# Altium PCB DS159-1.0-B呼吸率传感器.PcbDoc
Units mm, origin at the board's own origin, x right, y up, seen from the top; angles counter-clockwise.
Board outline 41 x 64 mm, 2 copper layers (Top Layer, Bottom Layer), stack 1.581 mm thick; 18 components, 30 nets, 90 pads, 34 vias.
Unrouted connection lines stored in the file: 7.
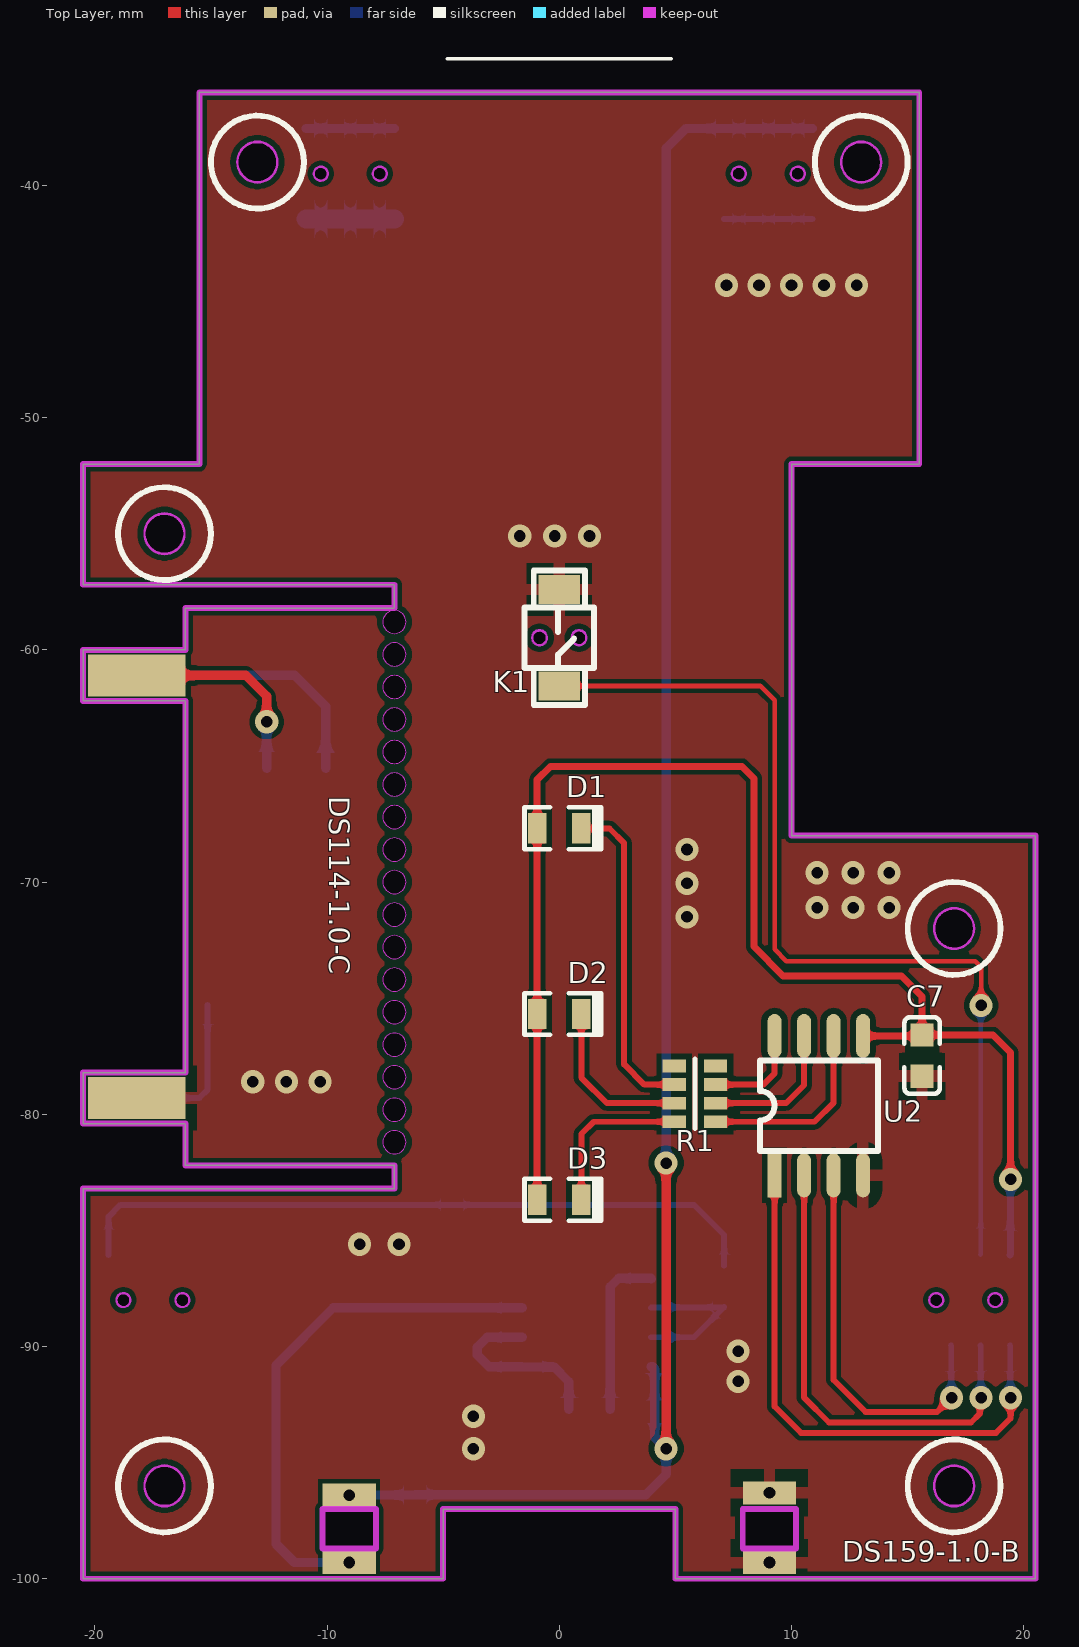
[diagram p0: Top Layer view]
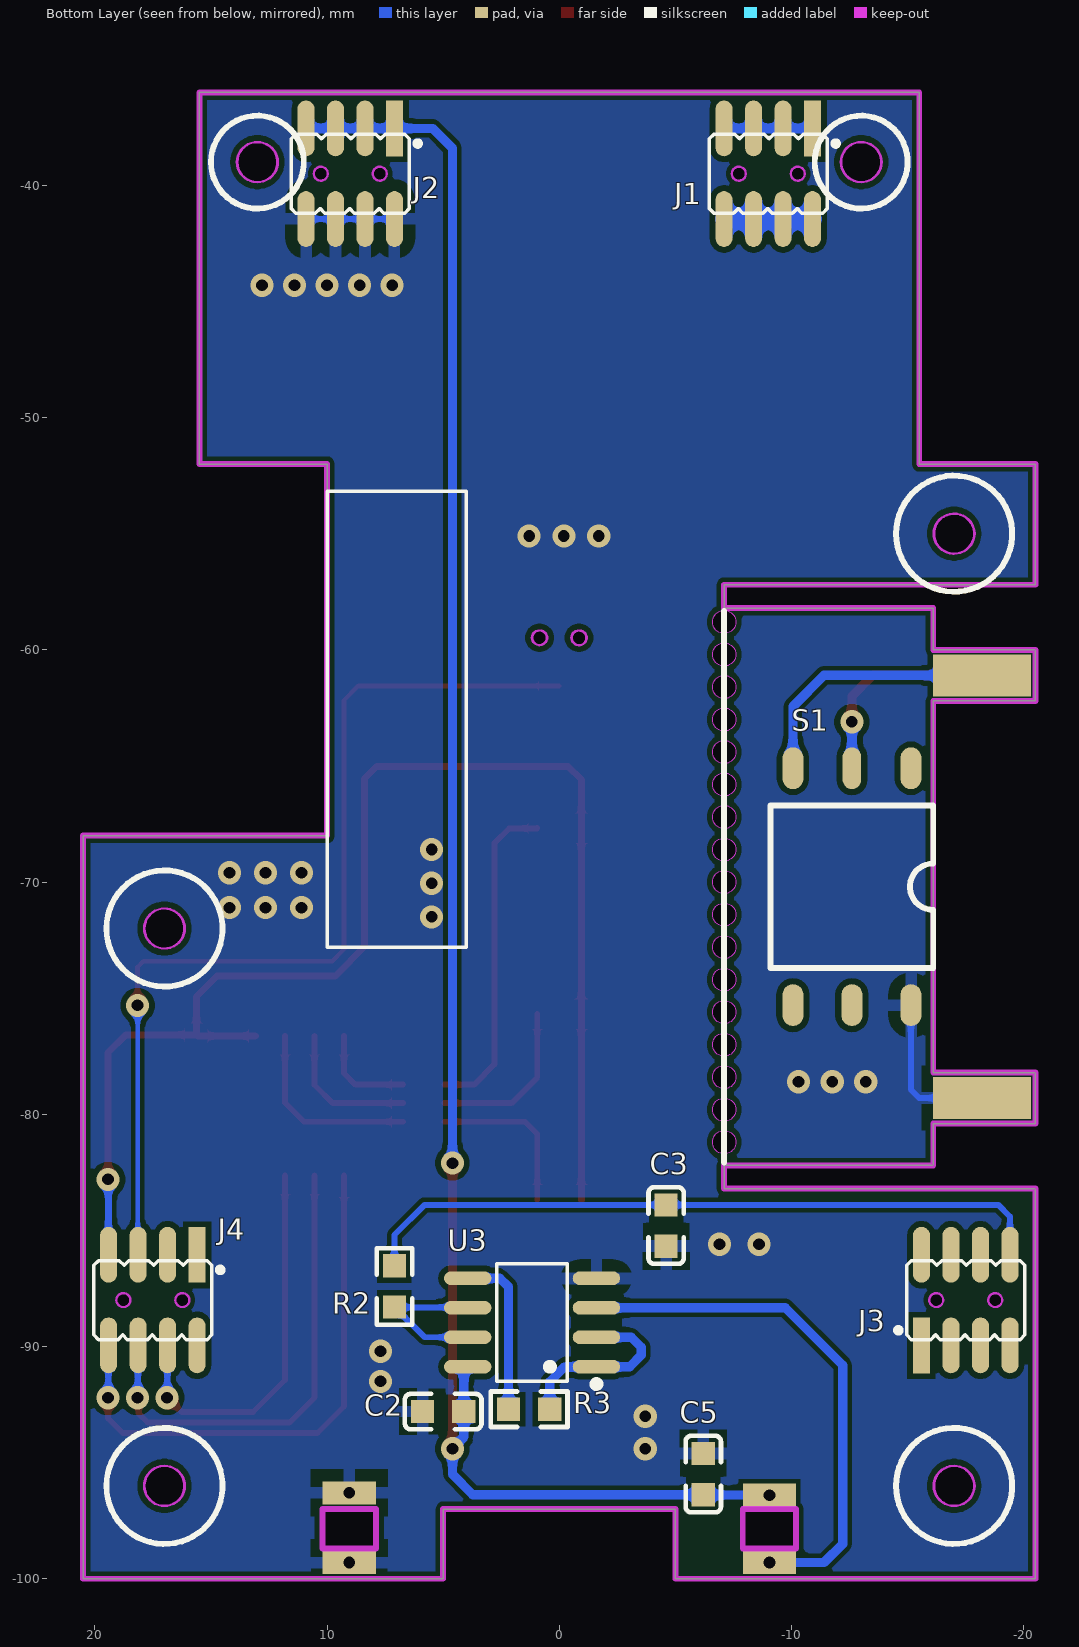
[diagram p1: Bottom Layer view, seen from below]
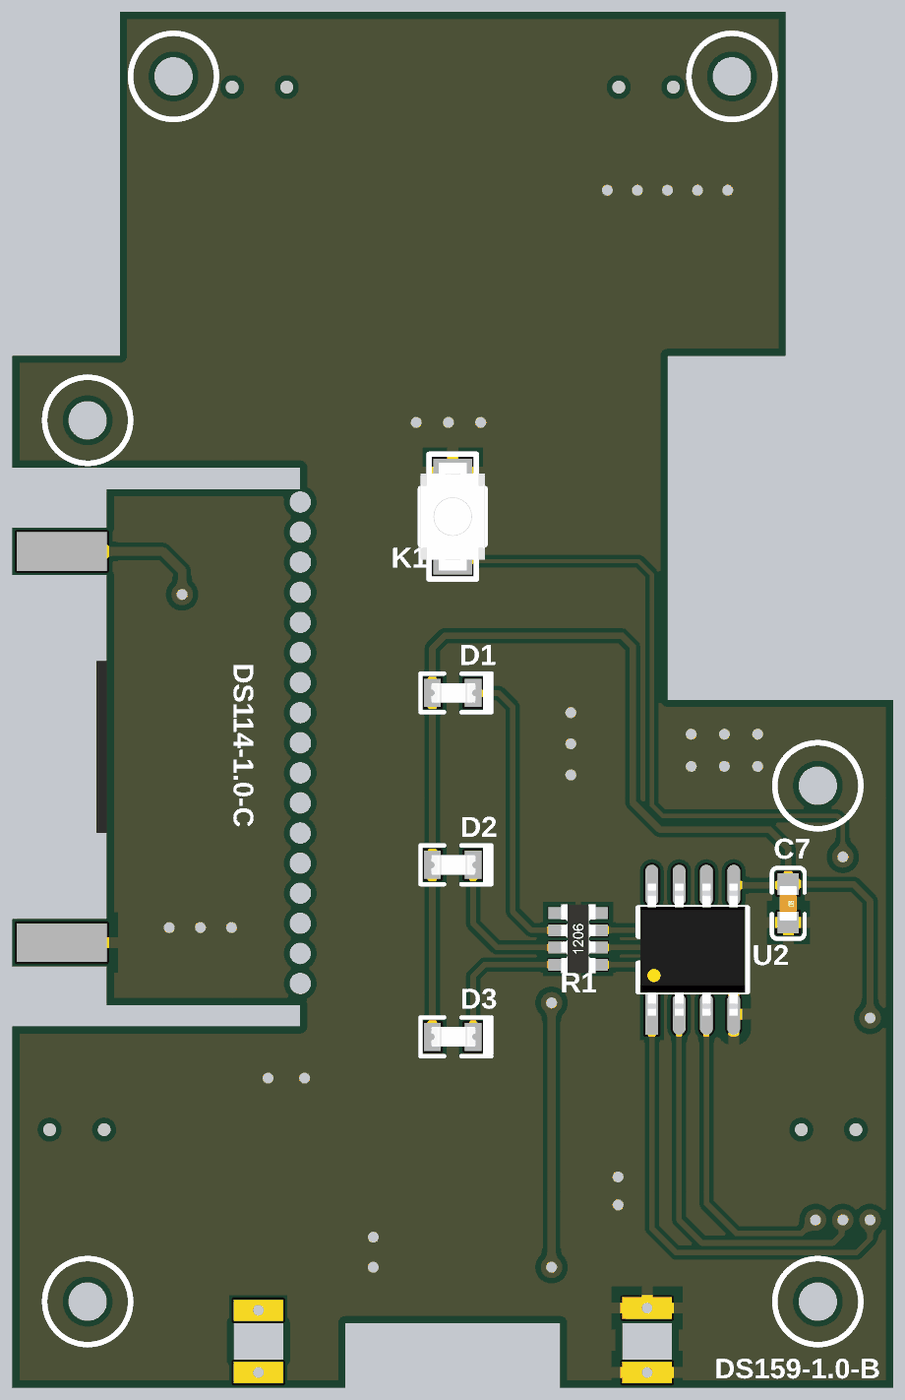
[diagram p2: 3D render of the assembled board from above, using the file's embedded part models]
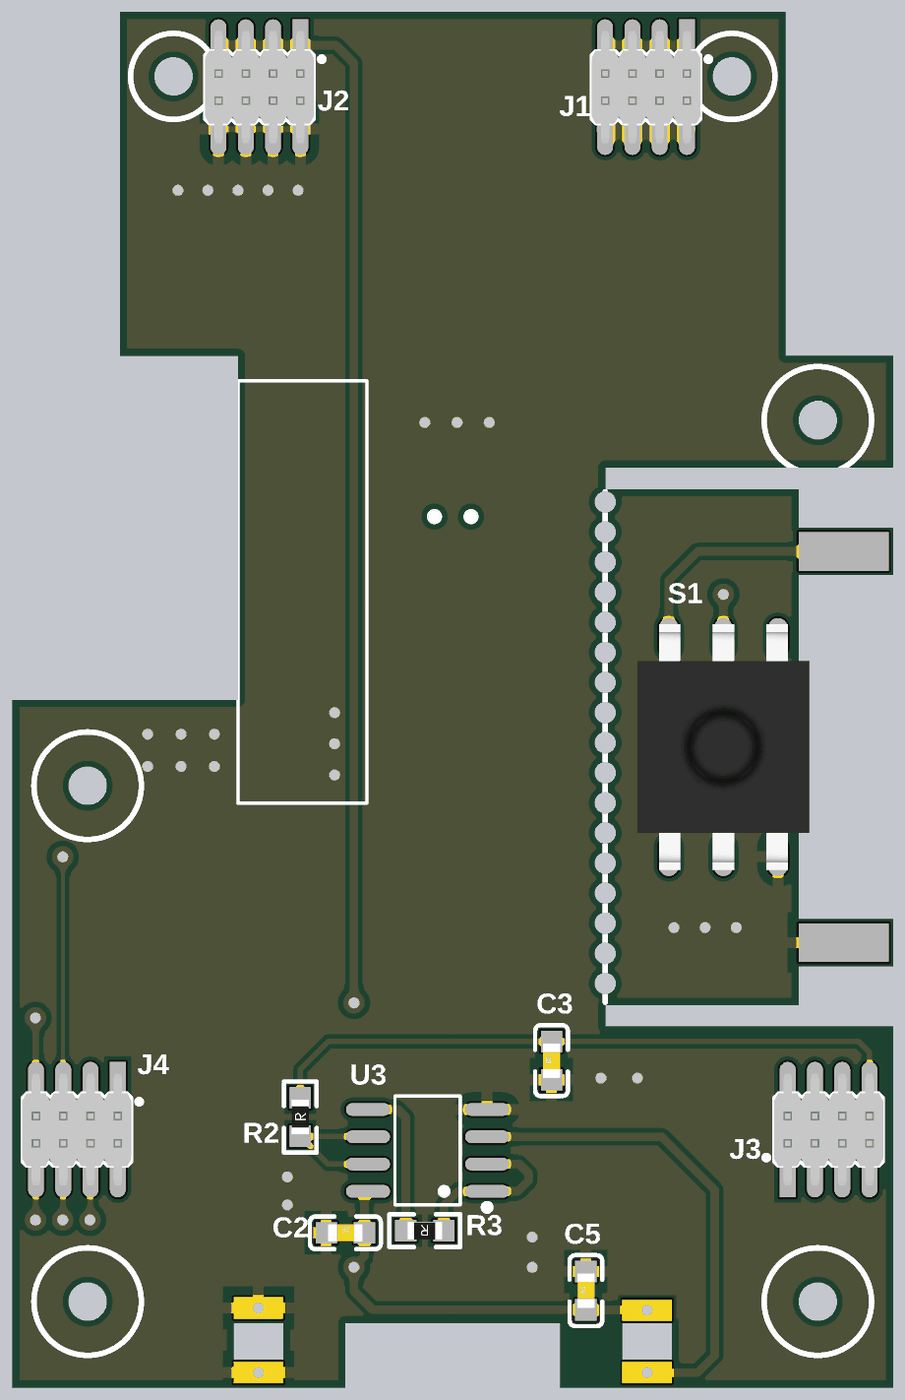
[diagram p3: 3D render of the assembled board from below, using the file's embedded part models]

## Layer stack, top to bottom
Top Solder: solder mask 0.0102, Solder Resist, Dk 3.5
Top Layer: signal copper 0.0356
Dielectric 1: dielectric 1.51, FR-4, Dk 4.8
Bottom Layer: signal copper 0.0356
Bottom Solder: solder mask 0.0102, Solder Resist, Dk 3.5

## Board outline
-20.5,-100 -20.5,-83.2 -7.1,-83.2 -7.1,-82.2 -16.1,-82.2 -16.1,-80.4 -20.5,-80.4 -20.5,-78.2 -16.1,-78.2 -16.1,-62.2 -20.5,-62.2 -20.5,-60 -16.1,-60 -16.1,-58.2 -7.1,-58.2 -7.1,-57.2 -20.5,-57.2 -20.5,-52 -15.5,-52 -15.5,-36 15.5,-36 15.5,-52 10,-52 10,-68 20.5,-68 20.5,-100 5,-100 5,-97 -5,-97 -5,-100
cut-out: -7.6,-81.2 ccw(c-7.1,-81.2) -7.1,-81.7 ccw(c-7.1,-81.2) -6.6,-81.2 ccw(c-7.1,-81.2) -7.1,-80.7 ccw(c-7.1,-81.2)
cut-out: -7.6,-79.8 ccw(c-7.1,-79.8) -7.1,-80.3 ccw(c-7.1,-79.8) -6.6,-79.8 ccw(c-7.1,-79.8) -7.1,-79.3 ccw(c-7.1,-79.8)
cut-out: -7.6,-78.4 ccw(c-7.1,-78.4) -7.1,-78.9 ccw(c-7.1,-78.4) -6.6,-78.4 ccw(c-7.1,-78.4) -7.1,-77.9 ccw(c-7.1,-78.4)
cut-out: -7.6,-77 ccw(c-7.1,-77) -7.1,-77.5 ccw(c-7.1,-77) -6.6,-77 ccw(c-7.1,-77) -7.1,-76.5 ccw(c-7.1,-77)
cut-out: -7.6,-75.6 ccw(c-7.1,-75.6) -7.1,-76.1 ccw(c-7.1,-75.6) -6.6,-75.6 ccw(c-7.1,-75.6) -7.1,-75.1 ccw(c-7.1,-75.6)
cut-out: -7.6,-74.2 ccw(c-7.1,-74.2) -7.1,-74.7 ccw(c-7.1,-74.2) -6.6,-74.2 ccw(c-7.1,-74.2) -7.1,-73.7 ccw(c-7.1,-74.2)
cut-out: -7.6,-72.8 ccw(c-7.1,-72.8) -7.1,-73.3 ccw(c-7.1,-72.8) -6.6,-72.8 ccw(c-7.1,-72.8) -7.1,-72.3 ccw(c-7.1,-72.8)
cut-out: -7.6,-71.4 ccw(c-7.1,-71.4) -7.1,-71.9 ccw(c-7.1,-71.4) -6.6,-71.4 ccw(c-7.1,-71.4) -7.1,-70.9 ccw(c-7.1,-71.4)
cut-out: -7.6,-70 ccw(c-7.1,-70) -7.1,-70.5 ccw(c-7.1,-70) -6.6,-70 ccw(c-7.1,-70) -7.1,-69.5 ccw(c-7.1,-70)
cut-out: -7.6,-68.6 ccw(c-7.1,-68.6) -7.1,-69.1 ccw(c-7.1,-68.6) -6.6,-68.6 ccw(c-7.1,-68.6) -7.1,-68.1 ccw(c-7.1,-68.6)
cut-out: -7.6,-67.2 ccw(c-7.1,-67.2) -7.1,-67.7 ccw(c-7.1,-67.2) -6.6,-67.2 ccw(c-7.1,-67.2) -7.1,-66.7 ccw(c-7.1,-67.2)
cut-out: -7.6,-65.8 ccw(c-7.1,-65.8) -7.1,-66.3 ccw(c-7.1,-65.8) -6.6,-65.8 ccw(c-7.1,-65.8) -7.1,-65.3 ccw(c-7.1,-65.8)
cut-out: -7.6,-64.4 ccw(c-7.1,-64.4) -7.1,-64.9 ccw(c-7.1,-64.4) -6.6,-64.4 ccw(c-7.1,-64.4) -7.1,-63.9 ccw(c-7.1,-64.4)
cut-out: -7.6,-63 ccw(c-7.1,-63) -7.1,-63.5 ccw(c-7.1,-63) -6.6,-63 ccw(c-7.1,-63) -7.1,-62.5 ccw(c-7.1,-63)
cut-out: -7.6,-61.6 ccw(c-7.1,-61.6) -7.1,-62.1 ccw(c-7.1,-61.6) -6.6,-61.6 ccw(c-7.1,-61.6) -7.1,-61.1 ccw(c-7.1,-61.6)
cut-out: -7.6,-60.2 ccw(c-7.1,-60.2) -7.1,-60.7 ccw(c-7.1,-60.2) -6.6,-60.2 ccw(c-7.1,-60.2) -7.1,-59.7 ccw(c-7.1,-60.2)
cut-out: -7.6,-58.8 ccw(c-7.1,-58.8) -7.1,-59.3 ccw(c-7.1,-58.8) -6.6,-58.8 ccw(c-7.1,-58.8) -7.1,-58.3 ccw(c-7.1,-58.8)
cut-out: -17.9,-96 ccw(c-17,-96) -17,-96.9 ccw(c-17,-96) -16.1,-96 ccw(c-17,-96) -17,-95.1 ccw(c-17,-96)
cut-out: 16.1,-96 ccw(c17,-96) 17,-96.9 ccw(c17,-96) 17.9,-96 ccw(c17,-96) 17,-95.1 ccw(c17,-96)
cut-out: 16.1,-72 ccw(c17,-72) 17,-72.9 ccw(c17,-72) 17.9,-72 ccw(c17,-72) 17,-71.1 ccw(c17,-72)
cut-out: -17.9,-55 ccw(c-17,-55) -17,-55.9 ccw(c-17,-55) -16.1,-55 ccw(c-17,-55) -17,-54.1 ccw(c-17,-55)
cut-out: 12.1,-39 ccw(c13,-39) 13,-39.9 ccw(c13,-39) 13.9,-39 ccw(c13,-39) 13,-38.1 ccw(c13,-39)
cut-out: -13.9,-39 ccw(c-13,-39) -13,-39.9 ccw(c-13,-39) -12.1,-39 ccw(c-13,-39) -13,-38.1 ccw(c-13,-39)
cut-out: -10.2,-98.7 -10.2,-97 -7.9,-97 -7.9,-98.7
cut-out: 7.9,-98.7 10.2,-98.7 10.2,-97 7.9,-97

## Design rules (kind name [scope] priority, off if disabled: settings)
Clearance [All] p1: gap=0.2 ignorepadtopadclearanceinfootprint=FALSE except(0: Arc-Hole Track-Hole SMDPad-Hole THPad-Hole Via-Hole Fill-Hole Poly-Hole Region-Hole Text-Hole; 0.15: SMDPad-SMDPad; 0.254: SMDPad-Via SMDPad-Fill SMDPad-Poly SMDPad-Region THPad-THPad THPad-Via THPad-Text Via-Via Via-Fill Via-Poly Via-Region Via-Text Fill-Fill Fill-Poly Fill-Region Fill-Text Poly-Poly Poly-Region Poly-Text Region-Region Region-Text Text-Text)
MinimumSolderMaskSliver [All] p1: minsoldermaskwidth=0.2
PlaneConnect [All] p1: planeconnectstyle=Relief reliefexpansion=0.508 reliefentries=4 reliefconductorwidth=0.254 reliefairgap=0.508
PolygonConnect [InNet('GND') vs InNet('GND')] p1: thpad.connectstyle=Relief thpad.reliefconductorwidth=0.508 thpad.reliefentries=4 thpad.polygonreliefangle="90 Angle" thpad.airgapwidth=0.508 smdpad.connectstyle=Relief smdpad.reliefconductorwidth=0.508 smdpad.reliefentries=4 smdpad.polygonreliefangle="90 Angle" smdpad.airgapwidth=0.508 via.connectstyle=Direct via.reliefconductorwidth=0.254 via.reliefentries=4 via.polygonreliefangle="45 Angle" via.airgapwidth=0.254
RoutingVias [All] p1: holewidth=0.6 width=1 viastyle="Through Hole" minholewidth=0.4 minwidth=0.8 maxholewidth=1 maxwidth=2
SilkToSilkClearance [All] p1: silktosilkclearance=0.1
SilkToSolderMaskClearance [IsPad] p1: minsilkscreentomaskgap=0.05 clearancetoexposedcopper=TRUE
SolderMaskExpansion [All] p1: expansion=0.102 istentingtop=FALSE
Width [All] p1: maxlimit=1 minlimit=0.2 preferedwidth=0.2
26 further rules are at their usual default settings.

## Components (designator, comment, footprint, x,y, rotation, side; value= is the part's Value field where it differs from the comment)
C2 "MLCC 100nF 50V ±10％ 0603" 0603CAP 5,-92.8 r180 bottom value=100nF
C3 "MLCC 100nF 50V ±10％ 0603" 0603CAP -4.6,-84.79 r90 bottom value=100nF
C5 "MLCC 100nF 50V ±10％ 0603" 0603CAP -6.2,-95.49 r90 bottom value=100nF
C7 "SMDCAP00013" 0603CAP 15.621,-77.47 r270 top value=100nF
D1 "SMDLED00010" LED_0805 0,-67.68 r0 top locked value=BLUE
D2 "SMDLED00003" LED_0805 0,-75.68 r0 top locked value=RED
D3 "Chip 翠绿LED 0805" LED_0805 0,-83.68 r0 top locked value=GREEN
J1 "X1321WVS-2x04J-C40D53" X1321WVS-2X04J-C40D53 -9,-39.5 r0 bottom locked value=2*4P
J2 "X1321WVS-2x04J-C40D53" X1321WVS-2X04J-C40D53 9,-39.5 r0 bottom locked value=2*4P
J3 "X1321WVS-2x04J-C40D53" X1321WVS-2X04J-C40D53 -17.5,-88 r180 bottom locked value=2*4P
J4 "X1321WVS-2x04J-C40D53" X1321WVS-2X04J-C40D53 17.5,-88 r0 bottom locked value=2*4P
K1 "TS-1185-B-A-A-A" KEY_TS-1185-X-A-A-A 0,-59.48 r270 top locked
R1 "SMDRES05003" 0603RES_PACK4 5.842,-79.121 r180 top value=510R
R2 "SMDRES00046" 0603RES 7.1,-87.411 r90 bottom value=3.9K
R3 "SMDRES00015" 0603RES 1.3,-92.7 r0 bottom value=100R
S1 "XGZP6859A020 SOP封装 -20~20kPa" SOP-KPa -12.6,-70.2 r270 bottom value=XGZP6859A020
U2 "SMDIC000018" SO-8 11.176,-79.629 r90 top value=ULN2001
U3 "OPA2188AIDR" SOIC-8-120 -1.6,-90.87 r90 bottom value=OPA2188

## Footprints (in the part's own frame and the unit in brackets; to place one, negate y for a bottom-side part, rotate by r counter-clockwise, add the part's x,y. Pads: shape width x height; smd on the part's side, far side on the other; paste and mask are expansions set on the pad)
0603CAP [mm]
  rect 1x1 smd: 1(-0.889,0) 2(0.89,0)
  silkscreen extent -1.65,-0.76 1.65,0.76, body extent -0.8,-0.4 0.8,0.4, height 0.3
0603RES [mm]
  rect 1x1 smd: 1(-0.889,0) 2(0.889,0)
  silkscreen extent -1.65,-0.76 1.65,0.76, body extent -0.8,-0.41 0.8,0.41, height 0.51
0603RES_PACK4 [mm]
  rect 1x0.55 smd mask+0.05: 1(-0.889,1.2) 2(-0.889,0.4) 3(-0.889,-0.4) 4(-0.889,-1.2) 5(0.889,-1.2) 6(0.889,-0.4) 7(0.889,0.4) 8(0.889,1.2)
  silkscreen extent 0,-1.5 0,1.5, body extent -0.8,-1.6 0.8,1.6, height 0.5
KEY_TS-1185-X-A-A-A [mm]
  rect 1.25x1.8 smd: 1(-2.075,0) 2(2.075,0)
  Keep-Out Layer board cut-out: 0.35,-0.85 0.323,-0.716 0.247,-0.603 0.134,-0.527 0,-0.5 0,-0.5 -0.134,-0.527 -0.247,-0.603 -0.323,-0.716 -0.35,-0.85 -0.35,-0.85 -0.323,-0.984 -0.247,-1.097 -0.134,-1.173 0,-1.2 0,-1.2 0.134,-1.173 0.247,-1.097 0.323,-0.984 0.35,-0.85
  Keep-Out Layer board cut-out: -0.35,0.85 -0.323,0.716 -0.247,0.603 -0.134,0.527 0,0.5 0,0.5 0.134,0.527 0.247,0.603 0.323,0.716 0.35,0.85 0.35,0.85 0.323,0.984 0.247,1.097 0.134,1.173 0,1.2 0,1.2 -0.134,1.173 -0.247,1.097 -0.323,0.984 -0.35,0.85
  silkscreen extent -2.9,-1.5 2.9,1.5, body extent -2.5,-1.5 2.5,1.5, height 2
LED_0805 [mm]
  rect 0.8x1.3 smd: 1(-0.95,0) 2(0.95,0)
  silkscreen extent -1.5,-0.9 1.8,0.9, body extent -1,-0.45 1.06,0.45, height 0.85
SO-8 [mm]
  rect 1.9x0.6 smd: 1(-3,1.905)
  oval 1.9x0.6 smd: 2(-3,0.635) 3(-3,-0.635) 4(-3,-1.905) 5(3,-1.905) 6(3,-0.635) 7(3,0.635) 8(3,1.905)
  silkscreen extent -1.95,-2.54 1.95,2.54, body extent -3.07,-2.44 3.07,2.44, height 1.77
SOIC-8-120 [mm]
  oval 0.588x2.045 smd: 1(0,0) 2(1.27,0) 3(2.54,0) 4(3.81,0) 5(3.81,5.545) 6(2.54,5.545) 7(1.27,5.545) 8(0,5.545)
  silkscreen extent -0.9,-0.15 4.43,4.29
SOP-KPa [mm]
  oval 1.8x0.9 smd: 1(-5.1,2.54) 3(-5.1,-2.54) 4(5.1,-2.54) 5(5.1,0) 6(5.1,2.54)
  oval 1.8x0.8 smd: 2(-5.1,0)
  silkscreen extent -3.5,-3.5 3.5,3.5, body extent -5.72,-4 5.72,4, height 9.6
X1321WVS-2X04J-C40D53 [mm]
  rect 0.74x2.4 smd: 1(-1.905,-1.95)
  oval 0.74x2.4 smd: 2(-1.905,1.95) 3(-0.635,-1.95) 4(-0.635,1.95) 5(0.635,-1.95) 6(0.635,1.95) 7(1.905,-1.95) 8(1.905,1.95)
  Keep-Out Layer board cut-out: -1.57,0 -1.547,-0.115 -1.482,-0.212 -1.385,-0.277 -1.27,-0.3 -1.27,-0.3 -1.155,-0.277 -1.058,-0.212 -0.993,-0.115 -0.97,0 -0.97,0 -0.993,0.115 -1.058,0.212 -1.155,0.277 -1.27,0.3 -1.27,0.3 -1.385,0.277 -1.482,0.212 -1.547,0.115 -1.57,0
  Keep-Out Layer board cut-out: 1.57,0 1.547,0.115 1.482,0.212 1.385,0.277 1.27,0.3 1.27,0.3 1.155,0.277 1.058,0.212 0.993,0.115 0.97,0 0.97,0 0.993,-0.115 1.058,-0.212 1.155,-0.277 1.27,-0.3 1.27,-0.3 1.385,-0.277 1.482,-0.212 1.547,-0.115 1.57,0
  Keep-Out Layer circle w0.1: c1.27,0 r0.3
  Keep-Out Layer circle w0.1: c-1.27,0 r0.3
  silkscreen extent -3,-1.7 2.54,1.7, body extent -2.54,-2.6 2.54,2.6, height 5.5

## Part data
C2 C3 C5: "贴片电容"
C7: library part "MLCC 100nF 50V ±10％ 0603", "贴片电容"
D1: library part "Chip 蓝色LED 0805", "贴片LED"
D2: library part "Chip 红色LED 0805", "贴片LED"
D3: "贴片LED"
J1 J2 J3 J4: "双排针2x4P 立贴 1.27mm"
K1: "轻触开关"
R1: library part "Chip R*4 510R 1/16W ±5％ 0603", "贴片排阻"
R2: library part "Chip 3.9K 1/16W ±1％ 0603", "贴片电阻"
R3: library part "Chip 100R 1/16W ±1％ 0603", "贴片电阻"
S1: "气压传感器"
U2: library part "ULN2001 SOP-8", "电机驱动芯片"
U3: "运放芯片"

## Free pads (board coordinates)
  rect 4.2x1.8 smd far side mask+0.102: 1(-18.2,-79.3) 2(-18.2,-61.1)
  rect 2.3x1 hole 0.5 mask+0.102: 1(9.05,-99.3) 2(-9.05,-99.3) 3(-9.05,-96.4) 4(9.05,-96.3)
  rect 4.2x1.8 smd mask+0.102: 3(-18.2,-61.1) 4(-18.2,-79.3)

## Via types
v1: diameter 1, hole 0.5, Top Layer to Bottom Layer, tented both sides, 34 vias

## Nets (pads, with @x,y where several pads share a name; then routed paths per layer and width w, separated by ;. In a path a pad name is that pad's centre, name@x,y a point inside that pad or via, vN(x,y) a via of type N, cw(c..) or ccw(c..) an arc to the next point about the centre after c; other vN are vias at no path point)
ADC0: C3.2 J3.8 R2.2 | length 30.2
  Bottom Layer w0.254: J3.8 -19.405,-84.405 -18.9,-83.9 5.8,-83.9 7.1,-85.2 R2.2
ADC1: J4.2
DAC_OUT: J3.6
Dis1_red_EN: J4.4 U2.3 | length 17
  Top Layer w0.254: U2.3 11.811,-91.44 13.189,-92.818 16.261,-92.818 16.877,-92.202 v1(16.891,-92.202)
  Bottom Layer w0.254: J4.4 16.878,-89.963 16.878,-92.189 v1(16.891,-92.202)
Dis2_green_EN: J4.6 U2.2 | length 20.7
  Top Layer w0.254: U2.2 10.541,-92.202 11.611,-93.272 17.726,-93.272 18.11,-92.888 18.11,-92.253 v1(18.161,-92.202)
  Bottom Layer w0.254: J4.6 18.148,-89.963 18.148,-92.189 v1(18.161,-92.202)
Dis3_blue_EN: J4.8 U2.1 | length 24
  Top Layer w0.254: U2.1 9.271,-92.583 10.414,-93.726 18.796,-93.726 19.431,-93.091 v1(19.431,-92.202)
  Bottom Layer w0.254: J4.8 19.418,-89.963 19.418,-92.189 v1(19.431,-92.202)
GND: C2.1 C3.1 C5.2 C7.2 J2.2 J2.4 J2.6 J2.8 K1.1 pad.1 pad.4 S1.6 U2.4 U3.4 | length 10.7
  Bottom Layer w0.254: pad.1@-18.2,-79.3 -15.5,-79.3 -15.14,-78.94 S1.6 ; J2.2 J2.4 J2.6 J2.8
  other v1: -3.7,-94.4 -3.7,-93 7.7,-91.5 7.7,-90.2 -8.6,-85.6 -6.9,-85.6 -13.2,-78.6 -11.75,-78.6 -10.3,-78.6 5.5,-71.5 11.1,-71.1 12.65,-71.1 14.2,-71.1 5.5,-70.05 11.1,-69.6 12.65,-69.6 14.2,-69.6 5.5,-68.6 -1.7,-55.1 -0.2,-55.1 1.3,-55.1 7.2,-44.3 8.6,-44.3 10,-44.3 11.4,-44.3 12.8,-44.3
I2C1_SCL: J4.1
I2C1_SDA: J4.3
KEY_HOME: J4.5 K1.2 | length 41.9
  Top Layer w0.2: K1.2 8.655,-61.555 9.271,-62.171 9.271,-72.898 9.779,-73.406 17.907,-73.406 18.161,-73.66 v1(18.161,-75.311)
  Bottom Layer w0.2: J4.5 18.148,-86.037 18.148,-75.324 v1(18.161,-75.311)
LED_blue: D1.2 R1.6 | length 14.2
  Top Layer w0.254: D1.2 0.961,-67.691 2.159,-67.691 2.794,-68.326 2.794,-77.851 3.664,-78.721 R1.6
LED_green: D3.2 R1.8 | length 7.1
  Top Layer w0.254: D3.2 0.95,-80.85 1.479,-80.321 R1.8
LED_red: D2.2 R1.7 | length 7.2
  Top Layer w0.254: D2.2 0.95,-78.42 2.051,-79.521 R1.7
NetR1_1: R1.1 U2.6 | length 8.3
  Top Layer w0.254: R1.1 10.992,-80.321 11.811,-79.502 U2.6
NetR1_2: R1.2 U2.7 | length 6.2
  Top Layer w0.254: R1.2 9.76,-79.521 10.541,-78.74 U2.7
NetR1_3: R1.3 U2.8 | length 4.3
  Top Layer w0.254: R1.3 8.782,-78.721 9.271,-78.232 U2.8
NetR2_1: R2.1 U3.6 U3.7 | length 6.8
  Bottom Layer w0.254: U3.7 5.8,-89.6 R2.1@7.085,-88.315 ; U3.6 3.96,-88.315 R2.1@7.085,-88.315 ; R2.1 R2.1@7.085,-88.315
NetR3_1: R3.1 U3.1 U3.2 | length 8.1
  Bottom Layer w0.4: U3.2 -3.1,-89.6 -3.534,-90.034 -3.534,-90.366 -3.03,-90.87 U3.1 -1.589,-90.881 -0.219,-90.881 0.411,-91.511 R3.1
NetR3_2: R3.2 U3.5 | length 7.2
  Bottom Layer w0.4: R3.2@2.183,-92.706 R3.2 2.189,-87.431 2.56,-87.06 U3.5 U3.5@3.965,-87.08
OUT: pad.2 S1.3 U3.3 | length 34.2
  Bottom Layer w0.4: pad.2@-18.2,-61.1 -11.4,-61.1 -10.06,-62.44 S1.3 ; pad.2@-9.05,-99.3 -11.4,-99.3 -12.2,-98.5 -12.2,-90.8 -9.73,-88.33 U3.3
SPI1/SPI2_CS: J3.4
SPI2_MISO: J3.1
SPI2_MOSI: J3.3
SPI2_SCK: J3.2
USART2_RXD: J3.5
USART2_TXD: J3.7
VBUS: J1.2 J1.4 J1.6 J1.8 | length 3.8
  Bottom Layer w0.8: J1.2 J1.4 J1.6 J1.8
VCC_3V3_MCU: C7.1 D1.1 D2.1 D3.1 J4.7 U2.5 | length 60.2
  Top Layer w0.3: D3.1 D2.1 D1.1 -0.95,-65.593 -0.378,-65.021 7.871,-65.021 8.382,-65.532 8.382,-72.782 9.641,-74.041 14.732,-74.041 15.621,-74.93 C7.1 18.669,-76.581 19.431,-77.343 v1(19.431,-82.804) ; U2.5 C7.1@15.573,-76.629
  Bottom Layer w0.3: J4.7 19.418,-86.037 19.418,-82.817 v1(19.431,-82.804)
VCC_5V: C2.2 C5.1 J2.1 J2.3 J2.5 J2.7 pad.3 S1.2 U3.8 | length 90.7
  Top Layer w0.4: pad.3@-18.2,-61.1 -13.5,-61.1 -12.6,-62 v1(-12.6,-63.1) ; v1(4.6,-94.4) v1(4.6,-82.1)
  Bottom Layer w0.4: S1.2 v1(-12.6,-63.1) ; pad.3@-9.05,-96.4 -9.039,-96.389 -6.21,-96.389 C5.1 3.721,-96.379 4.6,-95.5 4.6,-94.379 4.11,-93.889 C2.2 4.11,-90.957 4.023,-90.87 U3.8 ; v1(4.6,-82.1) 4.6,-38.4 5.45,-37.55 J2.1 J2.3 J2.5 J2.7
VSS: J1.1 J1.3 J1.5 J1.7 | length 3.8
  Bottom Layer w0.4: J1.1 J1.3 J1.5 J1.7
pads on no net: R1.4 R1.5 S1.1 S1.4 S1.5

## Polygon pours and split planes (outlines as drawn)
GND on Top Layer "GND_L01_P002" (solid, remove dead copper, pour order 2): -20.5,-100 -20.5,-83.2 -7.1,-83.2 -7.1,-82.2 -16.1,-82.2 -16.1,-80.4 -20.5,-80.4 -20.5,-78.2 -16.1,-78.2 -16.1,-62.2 -20.5,-62.2 -20.5,-60 -16.1,-60 -16.1,-58.2 -7.1,-58.2 -7.1,-57.2 -20.5,-57.2 -20.5,-52 -15.5,-52 -15.5,-36 15.5,-36 15.5,-52 10,-52 10,-68 20.5,-68 20.5,-100 5,-100 5,-97 -5,-97 -5,-100
GND on Bottom Layer "GND_L02_P003" (solid, remove dead copper, pour order 3): -20.5,-100 -20.5,-83.2 -7.1,-83.2 -7.1,-82.2 -16.1,-82.2 -16.1,-80.4 -20.5,-80.4 -20.5,-78.2 -16.1,-78.2 -16.1,-62.2 -20.5,-62.2 -20.5,-60 -16.1,-60 -16.1,-58.2 -7.1,-58.2 -7.1,-57.2 -20.5,-57.2 -20.5,-52 -15.5,-52 -15.5,-36 15.5,-36 15.5,-52 10,-52 10,-68 20.5,-68 20.5,-100 5,-100 5,-97 -5,-97 -5,-100

## Keep-outs
Keep-Out Layer:
  circle w0.1: c-0.851,-59.487 r0.316
  circle w0.1: c0.85,-59.481 r0.316
  circle w0.1: c17,-96 r0.86
  circle w0.1: c-17,-96 r0.86
  circle w0.1: c-17,-55 r0.86
  circle w0.1: c17,-72 r0.86
  circle w0.1: c13,-39 r0.86
  circle w0.1: c-13,-39 r0.86
  lines w0.254: -7.1,-57.2 -7.1,-58.2 -16.1,-58.2 -16.1,-60 -20.5,-60 -20.5,-62.2 -16.1,-62.2 -16.1,-78.2 -20.5,-78.2 -20.5,-80.4 -17.7,-80.4 -16.1,-80.4 -16.1,-82.2 -7.1,-82.2 -7.1,-83.2 -7.3,-83.2 -7.3,-83.2 -20.5,-83.2 -20.5,-100 -12,-100 -5,-100 -5,-97 5,-97 5,-100 12,-100 20.5,-100 20.5,-68 10,-68 10,-52 15.5,-52 15.5,-36 -15.5,-36 -15.5,-52 -20.5,-52 -20.5,-57.2 -7.1,-57.2 ; -7.1,-57.2 -7.1,-57.2 ; -10.2,-98.7 -7.9,-98.7 -7.9,-97 -10.2,-97 -10.2,-98.7 ; 7.9,-98.7 7.9,-97 10.2,-97 10.2,-98.7 7.9,-98.7

## Other copper
Bottom Layer:
  pour cut-out: -0.5,-88.3 -0.5,-90.8 -2.7,-90.8 -2.7,-88.3
  pour cut-out: 5,-86.9 4.9,-87 4.9,-90.9 3,-90.9 3,-87

## Silkscreen, mask and mechanical layers (free items; w line width, h text height)
Top Overlay:
  circle w0.254: c13,-39 r2
  circle w0.254: c-13,-39 r2
  circle w0.254: c-17,-55 r2
  circle w0.254: c17,-72 r2
  circle w0.254: c17,-96 r2
  circle w0.254: c-17,-96 r2
  lines w0.15: -4.826,-34.55 4.826,-34.55 -4.826,-34.55
  text "DS114-1.0-C" at -10.2,-66.3 h1.5 r270
  text "DS159-1.0-B" at 12.192,-99.568 h1.5
Bottom Overlay:
  circle w0.254: c13,-39 r2
  circle w0.254: c-13,-39 r2
  circle w0.254: c-17,-55 r2.5
  circle w0.254: c17,-72 r2.5
  circle w0.254: c17,-96 r2.5
  circle w0.254: c-17,-96 r2.5
  lines w0.15: 4,-72.812 10,-72.812 10,-53.162 4,-53.162 4,-72.812
  lines w0.254: -7.1,-82.073 -7.1,-58.327
Mechanical 1:
  circle w0.254: c-7.1,-81.2 r0.5
  circle w0.254: c-7.1,-79.8 r0.5
  circle w0.254: c-7.1,-78.4 r0.5
  circle w0.254: c-7.1,-77 r0.5
  circle w0.254: c-7.1,-75.6 r0.5
  circle w0.254: c-7.1,-74.2 r0.5
  circle w0.254: c-7.1,-72.8 r0.5
  circle w0.254: c-7.1,-71.4 r0.5
  circle w0.254: c-7.1,-70 r0.5
  circle w0.254: c-7.1,-68.6 r0.5
  circle w0.254: c-7.1,-67.2 r0.5
  circle w0.254: c-7.1,-65.8 r0.5
  circle w0.254: c-7.1,-64.4 r0.5
  circle w0.254: c-7.1,-63 r0.5
  circle w0.254: c-7.1,-61.6 r0.5
  circle w0.254: c-7.1,-60.2 r0.5
  circle w0.254: c-7.1,-58.8 r0.5
  circle w0.254: c-17,-96 r0.9
  circle w0.254: c17,-96 r0.9
  circle w0.254: c-17,-55 r0.9
  circle w0.254: c13,-39 r0.9
  circle w0.254: c-13,-39 r0.9
  circle w0.254: c17,-72 r0.9
  lines w0.254: -20.5,-100 -20.5,-83.2 -7.1,-83.2 -7.1,-82.2 -16.1,-82.2 -16.1,-80.4 -20.5,-80.4 -20.5,-78.2 -16.1,-78.2 -16.1,-62.2 -20.5,-62.2 -20.5,-60 -16.1,-60 -16.1,-58.2 -7.1,-58.2 -7.1,-57.2 -16.1,-57.2 -20.5,-57.2 -20.5,-52 -15.5,-52 -15.5,-36 15.5,-36 15.5,-52 10,-52 10,-68 20.5,-68 20.5,-100 12,-100 5,-100 5,-97 -5,-97 -5,-100 -12,-100 -20.5,-100 ; -10.2,-98.7 -7.9,-98.7 -7.9,-97 -10.2,-97 -10.2,-98.7 ; 7.9,-98.7 7.9,-97 10.2,-97 10.2,-98.7 7.9,-98.7
Mechanical 15:
  circle w0.254: c0,-67.68 r0.6
  circle w0.254: c0,-59.48 r1.5
  circle w0.254: c0,-75.68 r0.6
  circle w0.254: c0,-83.68 r0.6
  lines w0.15: -4.485,-36 -4.485,-44.41 4.485,-44.41 4.485,-36
  lines w0.508: -16,-51 16,-51